# Altium PCB NixieClock_B1.PcbDoc
Units mm, origin at the board's own origin, x right, y up, seen from the top; angles counter-clockwise.
Board outline 180 x 50 mm, 2 copper layers (Top Layer, Bottom Layer); 112 components, 113 nets, 374 pads, 238 vias.
Unrouted connection lines stored in the file: 4.
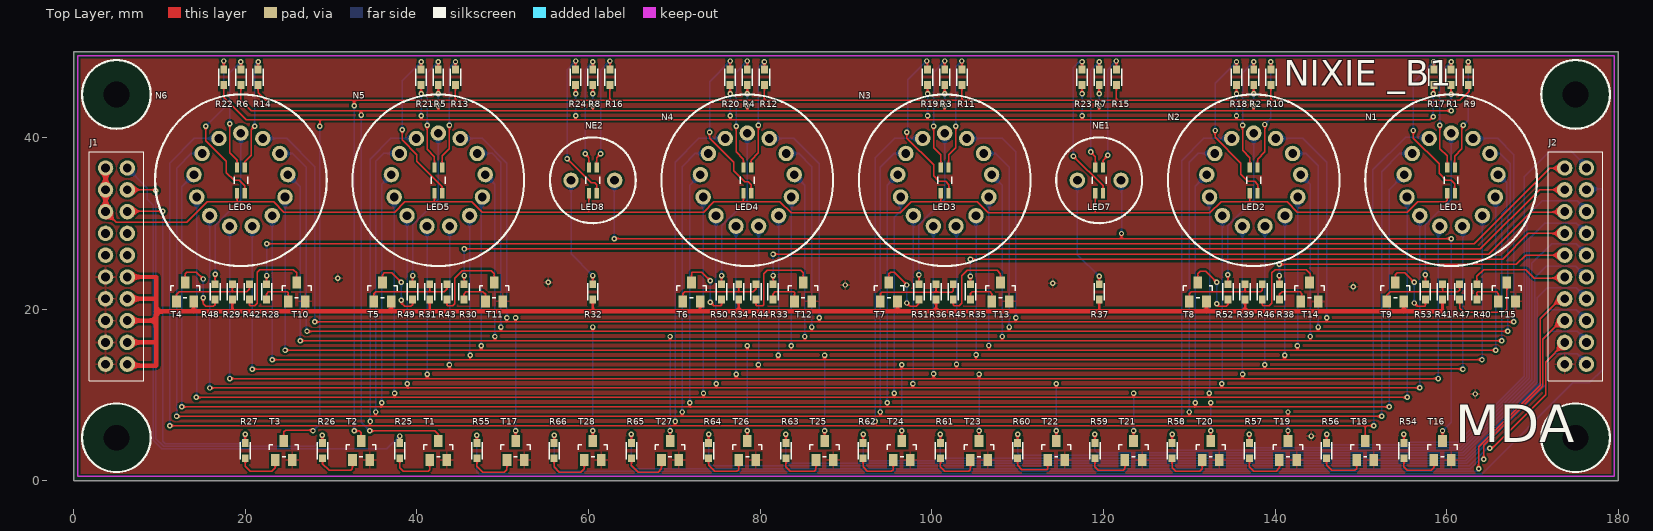
[diagram p0: Top Layer view]
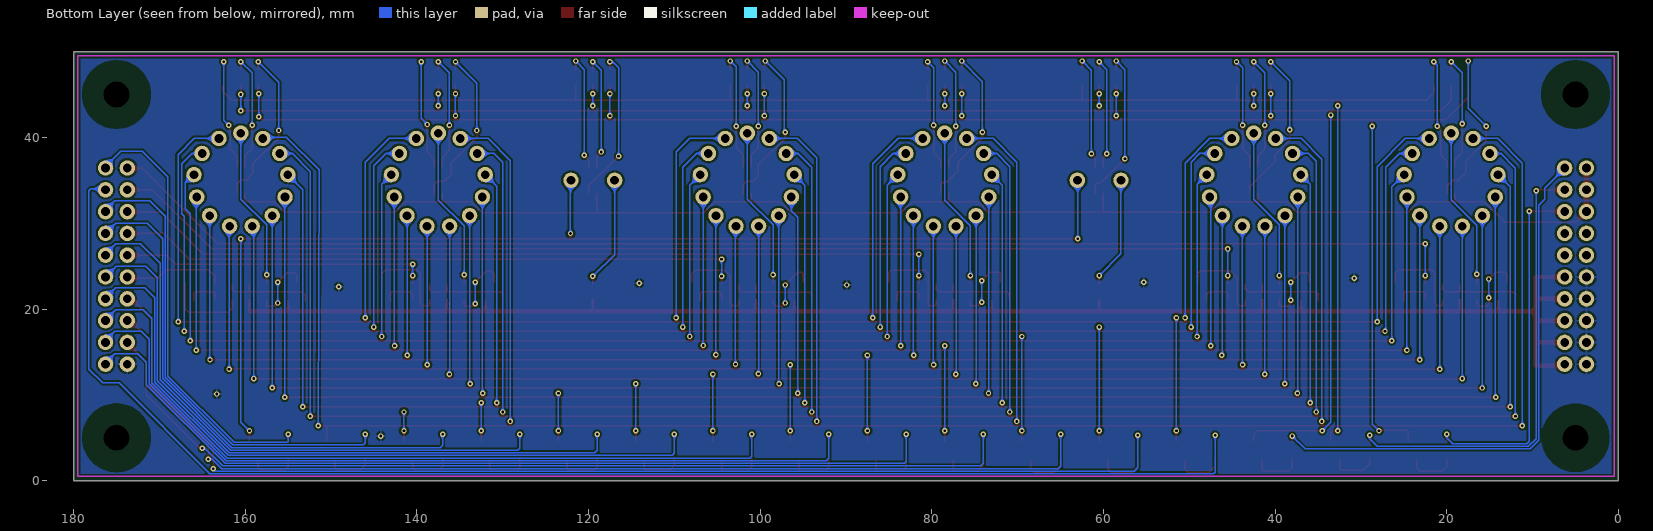
[diagram p1: Bottom Layer view, seen from below]
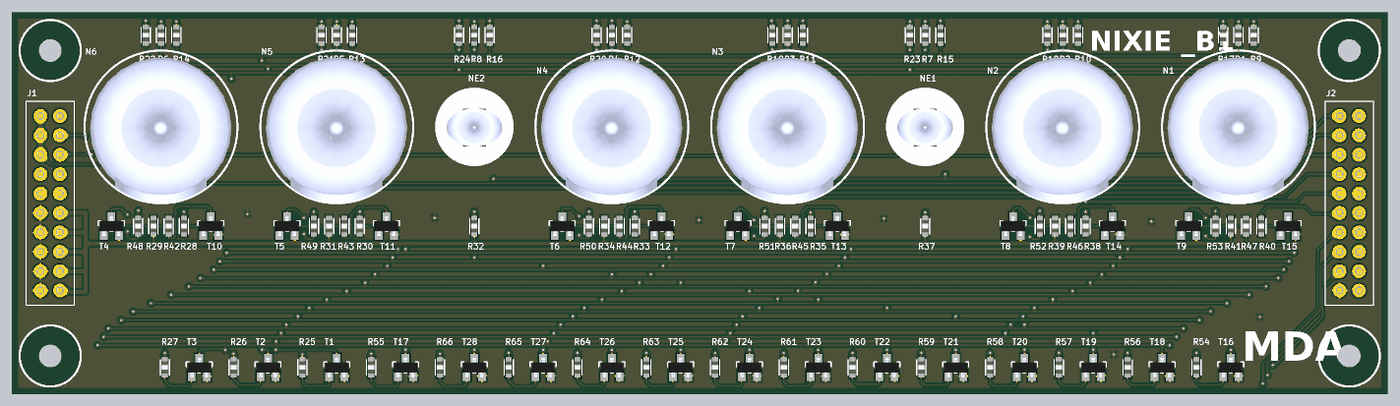
[diagram p2: 3D render of the assembled board from above, using the file's embedded part models]

## Layer stack, top to bottom
Top Solder: solder mask 0.0102, Solder Resist, Dk 3.5
Top Layer: signal copper 0.0356
Dielectric 1: dielectric 0.32, FR-4, Dk 4.8
Bottom Layer: signal copper 0.0356
Bottom Solder: solder mask 0.0102, Solder Resist, Dk 3.5

## Board outline
0,0 180,0 180,50 0,50

## Design rules (kind name [scope] priority, off if disabled: settings)
Clearance BottomPolygon [InNamedPolygon('Bottom Layer-GND')] p1: gap=0.254 ignorepadtopadclearanceinfootprint=FALSE
Clearance TopPolygon [InNamedPolygon('Top Layer-GND')] p2: gap=0.254 ignorepadtopadclearanceinfootprint=FALSE except(0: Arc-Hole Track-Hole SMDPad-Hole THPad-Hole Via-Hole Fill-Hole Poly-Hole Region-Hole Text-Hole)
Clearance [All] p3: gap=0.152 ignorepadtopadclearanceinfootprint=FALSE
ComponentClearance [All] p1: gap=0 collisioncheckmode=3 verticalgap=2540 showdistances=FALSE
Height [All] p1: minheight=0 maxheight=150 prefheight=12.7
HoleSize [All] p1: absolutevalues=TRUE maxlimit=5 minlimit=0.025 maxpercent=80.000 minpercent=20.000
MinimumSolderMaskSliver [All] p1: minsoldermaskwidth=0.152
PolygonConnect [All] p1: connectstyle=Relief reliefconductorwidth=0.254 reliefentries=4 polygonreliefangle="90 Angle" airgapwidth=0.254
RoutingVias [All] p1: holewidth=0.305 width=0.635 viastyle="Through Hole" minholewidth=0.305 minwidth=0.635 maxholewidth=0.305 maxwidth=0.635
SolderMaskExpansion [All] p1: expansion=0.102
Width [All] p1: maxlimit=0.508 minlimit=0.152 preferedwidth=0.254 minimp=50.000000 maximp=50.000000 favimp=50.000000
26 further rules are at their usual default settings.

## Classes and differential pairs
component class nixie_tube: J2 N1 N2 N3 N4 N5 N6 NE1 NE2 R28 R29 R30 R31 R32 R33 R34 R35 R36 R37 R38 R39 R40 R41 R42 R43 R44 R45 R46 R47 R48 R49 R50 R51 R52 R53 R54 R55 R56 R57 R58 R59 R60 R61 R62 R63 R64 R65 R66 T4 T5 T6 T7 T8 T9 T10 T11 T12 T13 T14 T15 T16 T17 T18 T19 T20 T21 T22 T23 T24 T25 T26 T27 T28
component class nixie_light: J1 LED1 LED2 LED3 LED4 LED5 LED6 LED7 LED8 R1 R2 R3 R4 R5 R6 R7 R8 R9 R10 R11 R12 R13 R14 R15 R16 R17 R18 R19 R20 R21 R22 R23 R24 R25 R26 R27 T1 T2 T3

## Components (designator, comment, footprint, x,y, rotation, side; value= is the part's Value field where it differs from the comment)
J1 "PIN_2X10" PIN_2X10_HDR 5,25 r270 top
J2 "PIN_2X10" PIN_2X10_HDR 175,25 r270 top
LED1 "RGB" 1205-RGB 160.5,35 r270 top
LED2 "RGB" 1205-RGB 137.5,35 r270 top
LED3 "RGB" 1205-RGB 101.5,35 r270 top
LED4 "RGB" 1205-RGB 78.5,35 r270 top
LED5 "RGB" 1205-RGB 42.5,35 r270 top
LED6 "RGB" 1205-RGB 19.5,35 r270 top
LED7 "RGB" 1205-RGB 119.5,35 r270 top
LED8 "RGB" 1205-RGB 60.5,35 r270 top
N1 "NIXIE-IN14" NIXIE_IN-14 160.5,35 r0 top
N2 "NIXIE-IN14" NIXIE_IN-14 137.5,35 r0 top
N3 "NIXIE-IN14" NIXIE_IN-14 101.5,35 r0 top locked
N4 "NIXIE-IN14" NIXIE_IN-14 78.5,35 r0 top
N5 "NIXIE-IN14" NIXIE_IN-14 42.5,35 r0 top locked
N6 "NIXIE-IN14" NIXIE_IN-14 19.5,35 r0 top locked
NE1 "NEON-LAMP" NIXIE_IN-3 119.5,35 r0 top
NE2 "NEON-LAMP" NIXIE_IN-3 60.5,35 r0 top
R1 "1K8Ω   1%" 0603 160.5,47 r90 top
R2 "1K8Ω   1%" 0603 137.5,47 r90 top
R3 "1K8Ω   1%" 0603 101.5,47 r90 top
R4 "1K8Ω   1%" 0603 78.5,47 r90 top
R5 "1K8Ω   1%" 0603 42.5,47 r90 top
R6 "1K8Ω   1%" 0603 19.5,47 r90 top
R7 "1K8Ω   1%" 0603 119.5,47 r90 top
R8 "1K8Ω   1%" 0603 60.5,47 r90 top
R9 "8K6Ω   1%" 0603 162.5,47 r90 top
R10 "8K6Ω   1%" 0603 139.5,47 r90 top
R11 "8K6Ω   1%" 0603 103.5,47 r90 top
R12 "8K6Ω   1%" 0603 80.5,47 r90 top
R13 "8K6Ω   1%" 0603 44.5,47 r90 top
R14 "8K6Ω   1%" 0603 21.5,47 r90 top
R15 "8K6Ω   1%" 0603 121.5,47 r90 top
R16 "8K6Ω   1%" 0603 62.5,47 r90 top
R17 "1K2Ω   1%" 0603 158.5,47 r90 top
R18 "1K2Ω   1%" 0603 135.5,47 r90 top
R19 "1K2Ω   1%" 0603 99.5,47 r90 top
R20 "1K2Ω   1%" 0603 76.5,47 r90 top
R21 "1K2Ω   1%" 0603 40.5,47 r90 top
R22 "1K2Ω   1%" 0603 17.5,47 r90 top
R23 "1K2Ω   1%" 0603 117.5,47 r90 top
R24 "1K2Ω   1%" 0603 58.5,47 r90 top
R25 "33KΩ   1%" 0603 38,3.5 r270 top
R26 "33KΩ   1%" 0603 29,3.5 r270 top
R27 "33KΩ   1%" 0603 20,3.5 r270 top
R28 "33KΩ   1%" 0603 22.5,22 r90 top
R29 "100KΩ   1%" 0603 18.5,22 r270 top
R30 "33KΩ   1%" 0603 45.5,22 r90 top
R31 "100KΩ   1%" 0603 41.5,22 r270 top
R32 "100KΩ   1%" 0603 60.5,22 r270 top
R33 "33KΩ   1%" 0603 81.5,22 r270 top
R34 "100KΩ   1%" 0603 77.5,22 r270 top
R35 "33KΩ   1%" 0603 104.5,22 r90 top
R36 "100KΩ   1%" 0603 100.5,22 r270 top
R37 "100KΩ   1%" 0603 119.5,22 r270 top
R38 "33KΩ   1%" 0603 140.5,22 r90 top
R39 "100KΩ   1%" 0603 136.5,22 r270 top
R40 "33KΩ   1%" 0603 163.5,22 r270 top
R41 "100KΩ   1%" 0603 159.5,22 r270 top
R42 "470KΩ   1%" 0603 20.5,22 r90 top
R43 "470KΩ   1%" 0603 43.5,22 r90 top
R44 "470KΩ   1%" 0603 79.5,22 r90 top
R45 "470KΩ   1%" 0603 102.5,22 r90 top
R46 "470KΩ   1%" 0603 138.5,22 r90 top
R47 "470KΩ   1%" 0603 161.5,22 r90 top
R48 "10KΩ   1%" 0603 16.5,22 r270 top
R49 "10KΩ   1%" 0603 39.5,22 r270 top
R50 "10KΩ   1%" 0603 75.5,22 r270 top
R51 "10KΩ   1%" 0603 98.5,22 r270 top
R52 "10KΩ   1%" 0603 134.5,22 r270 top
R53 "10KΩ   1%" 0603 157.5,22 r270 top
R54 "33KΩ   1%" 0603 155,3.5 r270 top
R55 "33KΩ   1%" 0603 47,3.5 r270 top
R56 "33KΩ   1%" 0603 146,3.5 r270 top
R57 "33KΩ   1%" 0603 137,3.5 r270 top
R58 "33KΩ   1%" 0603 128,3.5 r270 top
R59 "33KΩ   1%" 0603 119,3.5 r270 top
R60 "33KΩ   1%" 0603 110,3.5 r270 top
R61 "33KΩ   1%" 0603 101,3.5 r270 top
R62 "33KΩ   1%" 0603 92,3.5 r270 top
R63 "33KΩ   1%" 0603 83,3.5 r270 top
R64 "33KΩ   1%" 0603 74,3.5 r270 top
R65 "33KΩ   1%" 0603 65,3.5 r270 top
R66 "33KΩ   1%" 0603 56,3.5 r270 top
T1 "MMBTA42" SOT-23 42.5,3.5 r0 top
T2 "MMBTA42" SOT-23 33.5,3.5 r0 top
T3 "MMBTA42" SOT-23 24.5,3.5 r0 top
T4 "MMBTA92" SOT-23 13,22 r0 top
T5 "MMBTA92" SOT-23 36,22 r0 top
T6 "MMBTA92" SOT-23 72,22 r0 top
T7 "MMBTA92" SOT-23 95,22 r0 top
T8 "MMBTA92" SOT-23 131,22 r0 top
T9 "MMBTA92" SOT-23 154,22 r0 top
T10 "MMBTA42" SOT-23 26,22 r0 top
T11 "MMBTA42" SOT-23 49,22 r0 top
T12 "MMBTA42" SOT-23 85,22 r0 top
T13 "MMBTA42" SOT-23 108,22 r0 top
T14 "MMBTA42" SOT-23 144,22 r0 top
T15 "MMBTA42" SOT-23 167,22 r0 top
T16 "MMBTA42" SOT-23 159.5,3.5 r0 top
T17 "MMBTA42" SOT-23 51.5,3.5 r0 top
T18 "MMBTA42" SOT-23 150.5,3.5 r0 top
T19 "MMBTA42" SOT-23 141.5,3.5 r0 top
T20 "MMBTA42" SOT-23 132.5,3.5 r0 top
T21 "MMBTA42" SOT-23 123.5,3.5 r0 top
T22 "MMBTA42" SOT-23 114.5,3.5 r0 top
T23 "MMBTA42" SOT-23 105.5,3.5 r0 top
T24 "MMBTA42" SOT-23 96.5,3.5 r0 top
T25 "MMBTA42" SOT-23 87.5,3.5 r0 top
T26 "MMBTA42" SOT-23 78.5,3.5 r0 top
T27 "MMBTA42" SOT-23 69.5,3.5 r0 top
T28 "MMBTA42" SOT-23 60.5,3.5 r0 top

## Footprints (in the part's own frame and the unit in brackets; to place one, negate y for a bottom-side part, rotate by r counter-clockwise, add the part's x,y. Pads: shape width x height; smd on the part's side, far side on the other; paste and mask are expansions set on the pad)
0603 [mm]
  rect 0.9x0.8 smd: 1(-0.9,0) 2(0.9,0)
  silkscreen extent -1,-0.6 1,0.6, body extent -0.8,-0.43 0.8,0.43, height 0.83
1205-RGB [mm]
  rect 1.2x0.5 smd: 1(-1.5,-0.45) 2(1.5,-0.45) 3(1.5,0.45) 4(-1.5,0.45)
  silkscreen extent -0.4,-0.8 0.4,0.8, body extent -1.59,-0.81 1.61,0.79, height 1.1
NIXIE_IN-3 [mm]
  round 1.8 hole 1.02: 1(-2.54,0) 2(2.54,0)
  silkscreen extent -5,-5 5,5, body extent -5,-5.08 5,4.92, height 37.33
NIXIE_IN-14 [mm]
  round 1.8 hole 1: 1(0,5.5) 2(2.556,4.87) 3(4.527,3.124) 4(5.46,0.663) 5(5.142,-1.951) 6(3.647,-4.117) 7(1.316,-5.34) 8(-1.316,-5.34) 9(-3.647,-4.117) 10(-5.143,-1.95) 11(-5.46,0.663) 12(-4.526,3.124) 13(-2.556,4.87)
  silkscreen extent -10,-10 10,10, body extent -9.29,-9.91 9.21,9.09, height 70.15
PIN_2X10_HDR [mm]
  round 1.8 hole 1.02: 1(-11.43,-1.27) 2(-8.89,-1.27) 3(-6.35,-1.27) 4(-3.81,-1.27) 5(-1.27,-1.27) 6(1.27,-1.27) 7(3.81,-1.27) 8(6.35,-1.27) 9(8.89,-1.27) 10(11.43,-1.27) 11(-11.43,1.27) 12(-8.89,1.27) 13(-6.35,1.27) 14(-3.81,1.27) 15(-1.27,1.27) 16(1.27,1.27) 17(3.81,1.27) 18(6.35,1.27) 19(8.89,1.27) 20(11.43,1.27)
  silkscreen extent -13.34,-3.18 13.33,3.18, body extent -12.7,-2.54 12.7,2.54, height 2.29
SOT-23 [mm]
  rect 1x1.4 smd: 1(-1,-1.1) 2(1,-1.1) 3(0,1.1)
  silkscreen extent -1.7,-0.7 1.7,0.7, body extent -1.5,-1.25 1.5,1.25, height 1.15

## Part data
R1 R2 R3 R4 R5 R6 R7 R8 R9 R10 R11 R12 R13 R14 R15 R16 R17 R18 R19 R20 R21 R22 R23 R24 R25 R26 R27 R28 R29 R30 R31 R32 R33 R34 R35 R36 R37 R38 R39 R40 R41 R42 R43 R44 R45 R46 R47 R48 R49 R50 R51 R52 R53 R54 R55 R56 R57 R58 R59 R60 R61 R62 R63 R64 R65 R66: library part RES
T1 T2 T3 T10 T11 T12 T13 T14 T15 T16 T17 T18 T19 T20 T21 T22 T23 T24 T25 T26 T27 T28: library part NPN
T4 T5 T6 T7 T8 T9: library part PNP
J1 J2: System=Connector

## Free pads (board coordinates)
  round 0 hole 3 unplated: 0(5,5) 0(5,45) 0(175,5) 0(175,45)

## Via types
v1: diameter 0.635, hole 0.305, Top Layer to Bottom Layer, tented both sides, 238 vias

## Nets (pads, with @x,y where several pads share a name; then routed paths per layer and width w, separated by ;. In a path a pad name is that pad's centre, name@x,y a point inside that pad or via, vN(x,y) a via of type N, cw(c..) or ccw(c..) an arc to the next point about the centre after c; other vN are vias at no path point)
12V: J1.1 J1.2 J1.3 LED1.2 LED2.2 LED3.2 LED4.2 LED5.2 LED6.2 LED7.2 LED8.2 | length 178.6
  Top Layer w0.152: J1.3 4.98,30.1 13.2,30.1 15.6,32.5 19.1,32.5 ; LED6.2 19.05,32.55 19.1,32.5 ; LED5.2 42.05,32.55 42,32.5 ; LED8.2 60.05,31.35 60,31.3 ; LED4.2 78.05,32.55 78,32.5 ; LED3.2 101.05,32.55 101,32.5 ; LED7.2 119.05,31.25 119,31.2 ; LED2.2 137.05,32.55 137.1,32.5 ; LED1.2 160.05,32.65 159.9,32.5 156.6,32.5 155.4,31.3 142.6,31.3 141.4,32.5 137.1,32.5 ; 19.1,32.5 23.3,32.5 24.5,31.3 37.4,31.3 38.6,32.5 42,32.5 ; 42,32.5 46.4,32.5 47.6,31.3 60,31.3 ; 60,31.3 73.4,31.3 74.6,32.5 78,32.5 ; 78,32.5 82.3,32.5 83.6,31.2 96.3,31.2 97.6,32.5 101,32.5 ; 101,32.5 105.3,32.5 106.6,31.2 119,31.2 ; 119,31.2 132.4,31.2 133.7,32.5 137.1,32.5
  Top Layer w0.508: J1.3 J1.2 J1.1
180V: J1.16 J1.17 J1.18 J1.19 J1.20 R29.2 R31.2 R32.2 R34.2 R36.2 R37.2 R39.2 R41.2 T4.2 T5.2 T6.2 T7.2 T8.2 T9.2 | length 196.6
  Top Layer w0.254: 14,19.724 T4.2 ; 18.5,19.724 R29.2 ; 37,19.724 T5.2 ; R31.2 41.5,19.824 41.6,19.724 ; 60.5,19.724 R32.2 ; T6.2 73,19.824 73.1,19.724 ; 77.5,19.724 R34.2 ; 96,19.724 T7.2 ; 100.5,19.724 R36.2 ; R37.2 119.5,19.791 120.943,19.791 ; 132,19.724 T8.2 ; 136.5,19.724 R39.2 ; 155,19.724 T9.2 ; 159.5,19.724 R41.2
  Top Layer w0.508: J1.20 6.44,13.4 9.6,13.4 9.624,13.424 9.624,16.1 ; J1.19 9.614,16.11 9.624,16.1 ; J1.18 9.624,18.65 ; J1.17 9.614,21.19 9.624,21.2 ; J1.16 9.624,23.73 9.624,21.2 ; 159.5,19.724 155,19.724 136.5,19.724 132,19.724 100.5,19.724 96,19.724 77.5,19.724 73.1,19.724 60.5,19.724 41.6,19.724 37,19.724 18.5,19.724 14,19.724 9.624,19.724 ; 9.624,16.1 9.624,18.65 ; 9.624,18.65 9.624,19.724 ; 9.624,19.724 9.624,21.2
A0: N1.1 R53.1 | length 18.8
  Top Layer w0.152: R53.1 v1(157.5,24)
  Bottom Layer w0.152: v1(157.5,24) 157.5,29.8 160.5,32.8 N1.1
A1: N2.1 R52.1 | length 18.8
  Top Layer w0.152: R52.1 v1(134.5,24)
  Bottom Layer w0.152: v1(134.5,24) 134.5,29.7 137.5,32.7 N2.1
A2: N3.1 R51.1 | length 18.8
  Top Layer w0.152: R51.1 v1(98.5,24)
  Bottom Layer w0.152: v1(98.5,24) 98.5,29.8 101.5,32.8 N3.1
A3: N4.1 R50.1 | length 18.8
  Top Layer w0.152: R50.1 v1(75.5,23.9)
  Bottom Layer w0.152: v1(75.5,23.9) 75.5,29.7 78.5,32.7 N4.1
A4: N5.1 R49.1 | length 18.8
  Top Layer w0.152: R49.1 v1(39.5,23.9)
  Bottom Layer w0.152: v1(39.5,23.9) 39.5,29.8 42.5,32.8 N5.1
A5: N6.1 R48.1 | length 18.9
  Top Layer w0.152: R48.1 16.5,23.925 16.55,23.975 16.55,24.025 v1(16.525,24.05)
  Bottom Layer w0.152: v1(16.525,24.05) 16.525,29.775 19.5,32.75 N6.1
BLUE: J1.13 R27.1 | length 42.4
  Top Layer w0.152: J1.13 6.32,31.4 v1(10.4,31.4) ; R27.1 v1(20,5.4)
  Bottom Layer w0.152: v1(10.4,31.4) 10.4,4.6 10.69,4.31 19.31,4.31 20,5 v1(20,5.4)
D0: N1.12 N2.12 N3.12 N4.12 N5.12 N6.12 T19.3 | length 341.1
  Top Layer w0.152: v1(12,7.5) 34.1,7.5 35.2,7.5 ; v1(35.2,8) 35.2,7.5 ; v1(70.9,8) 70.9,7.5 ; v1(94,8) 94,7.5 ; v1(130,8) 130,7.5 ; T19.3 v1(141.5,5.8) ; v1(141.5,8) 141.5,7.5 ; v1(152.4,7.5) 141.5,7.5 ; 35.2,7.5 70.9,7.5 ; 70.9,7.5 94,7.5 ; 94,7.5 130,7.5 ; 130,7.5 141.5,7.5
  Bottom Layer w0.152: v1(12,7.5) 12,36.4 13.724,38.124 N6.12 ; v1(35.2,8) 35.2,37.2 36.124,38.124 N5.12 ; v1(70.9,8) 70.9,36.6 72.424,38.124 N4.12 ; v1(94,8) 94,36.5 95.624,38.124 N3.12 ; v1(130,8) 130,37.1 131.024,38.124 N2.12 ; v1(141.5,5.8) v1(141.5,8) ; v1(152.4,7.5) 152.4,36 154.524,38.124 N1.12
D1: N1.3 N2.3 N3.3 N4.3 N5.3 N6.3 T28.3 | length 290.5
  Top Layer w0.152: v1(27.2,17.4) 49.8,17.4 ; v1@49.9,17.9 v1(49.8,17.9) 49.8,17.4 ; T28.3 v1(60.5,5.8) ; v1(60.5,17.9) 60.5,17.4 ; v1(86,17.9) 86,17.4 ; v1(109,17.9) 109,17.4 ; v1(145,17.9) 145,17.4 ; v1(167.1,17.4) 145,17.4 ; 49.8,17.4 60.5,17.4 ; 60.5,17.4 86,17.4 ; 86,17.4 109,17.4 ; 109,17.4 145,17.4
  Bottom Layer w0.152: N6.3 25.476,38.124 27.1,36.5 27.1,17.5 v1(27.2,17.4) ; N5.3 48.776,38.124 49.8,37.1 v1(49.8,17.9) ; v1(60.5,5.8) v1(60.5,17.9) ; N4.3 84.476,38.124 86,36.6 v1(86,17.9) ; N3.3 107.376,38.124 109,36.5 v1(109,17.9) ; N2.3 143.576,38.124 145,36.7 v1(145,17.9) ; N1.3 166.176,38.124 167.4,36.9 167.4,31.1 167.1,30.8 v1(167.1,17.4)
D2: N1.4 N2.4 N3.4 N4.4 N5.4 N6.4 T27.3 | length 272.7
  Top Layer w0.152: v1(26.4,16.3) 49.1,16.3 ; v1(49.1,16.8) 49.1,16.3 ; T27.3 v1(69.5,5.8) ; v1(69.5,16.8) 69.5,16.3 ; v1(85.2,16.8) 85.2,16.3 ; v1(108.2,16.8) 108.2,16.3 ; v1(144.1,16.8) 144.1,16.3 ; v1(166.4,16.3) 144.1,16.3 ; 49.1,16.3 69.5,16.3 ; 69.5,16.3 85.2,16.3 ; 85.2,16.3 108.2,16.3 ; 108.2,16.3 144.1,16.3
  Bottom Layer w0.152: N6.4 26.4,34.223 v1(26.4,16.3) ; N5.4 49.1,34.523 v1(49.1,16.8) ; v1(69.5,5.8) v1(69.5,16.8) ; N4.4 85.2,34.423 v1(85.2,16.8) ; N3.4 108.2,34.423 v1(108.2,16.8) ; N2.4 144.1,34.523 v1(144.1,16.8) ; N1.4 166.023,35.6 N1.4@166.1,35.6 ; v1(166.4,16.3) 166.4,31.1 167,31.7 167,34.7 N1.4@166.1,35.6 ; N1.4@166.6,35.6 N1.4@166.1,35.6
D3: N1.5 N2.5 N3.5 N4.5 N5.5 N6.5 T26.3 | length 259.8
  Top Layer w0.152: v1@24.7,15.2 47.5,15.2 ; v1(47.5,15.7) 47.5,15.2 ; T26.3 v1(78.5,5.8) ; v1(78.5,15.7) 78.5,15.2 ; 83.6,15.3 v1(83.6,15.7) ; v1(106.65,15.75) 106.65,15.225 106.675,15.2 ; v1(142.6,15.7) 142.6,15.2 ; v1(165.7,15.2) 142.6,15.2 ; 47.5,15.2 78.5,15.2 ; 78.5,15.2 106.675,15.2 ; 106.675,15.2 142.6,15.2
  Bottom Layer w0.152: N6.5 24.642,15.258 v1@24.7,15.2 ; v1(47.5,15.7) 47.5,32.907 N5.5 ; v1(78.5,5.8) v1(78.5,15.7) ; v1(83.6,15.7) 83.642,15.742 N4.5 ; N3.5 106.642,15.758 v1(106.65,15.75) ; v1(142.6,15.7) 142.642,15.742 N2.5 ; N1.5 165.7,32.992 v1(165.7,15.2)
  other v1: 24.642,15.2
D4: N1.6 N2.6 N3.6 N4.6 N5.6 N6.6 T25.3 | length 252.2
  Top Layer w0.152: v1@23.2,14.1 46.1,14.1 ; v1(46.2,14.6) 46.2,14.2 46.1,14.1 ; v1(82.1,14.6) 82.1,14.1 ; T25.3 v1@87.5,5.7 ; v1(87.5,14.6) 87.5,14.1 ; v1(105.15,14.65) 105.15,14.125 105.125,14.1 ; v1(141.1,14.6) 141.1,14.1 ; v1(164.1,14.1) 141.1,14.1 ; 46.1,14.1 82.1,14.1 ; 82.1,14.1 87.5,14.1 ; 87.5,14.1 105.125,14.1 ; 105.125,14.1 141.1,14.1
  Bottom Layer w0.152: N6.6 23.147,14.153 v1@23.2,14.1 ; N5.6 46.147,14.653 v1(46.2,14.6) ; v1(82.1,14.6) 82.147,14.647 N4.6 ; v1(87.5,5.8) v1(87.5,14.6) ; N3.6 105.147,14.653 v1(105.15,14.65) ; v1(141.1,14.6) 141.147,14.647 N2.6 ; v1(164.1,14.1) 164.147,14.147 N1.6
  other v1: 23.147,14.1
D5: N1.7 N2.7 N3.7 N4.7 N5.7 N6.7 T24.3 | length 250.5
  Top Layer w0.152: v1(20.816,13) 43.8,13 ; v1(43.8,13.5) 43.8,13 ; v1(79.8,13.5) 79.8,13 ; T24.3 v1(96.5,5.8) ; v1(96.5,13.5) 96.5,13 ; v1(102.875,13.55) 102.875,13.021 ; v1(138.8,13.5) 138.8,13.021 ; v1@161.88,13.12 v1(161.88,13) 161.859,13.021 138.8,13.021 ; 43.8,13 79.8,13 ; 79.8,13 96.5,13 ; 96.5,13 96.521,13.021 102.875,13.021 ; 102.875,13.021 138.8,13.021
  Bottom Layer w0.152: v1@20.816,13.116 N6.7 ; v1@43.816,13.516 N5.7 ; v1(79.8,13.5) 79.816,13.516 N4.7 ; v1(96.5,5.8) v1(96.5,13.5) ; N3.7 102.875,29.601 v1(102.875,13.55) ; v1(138.8,13.5) 138.8,29.644 N2.7 ; N1.7 161.84,29.66 161.88,29.62 v1(161.88,13)
  Bottom Layer w0.254: v1(43.8,13.5) v1@43.816,13.516
D6: N1.8 N2.8 N3.8 N4.8 N5.8 N6.8 T23.3 | length 255.9
  Top Layer w0.152: v1@18.2,11.9 41.2,11.9 ; v1(41.2,12.4) 41.2,11.9 ; v1(77.2,12.4) 77.2,11.9 ; v1(100.2,12.475) 100.2,11.9 ; T23.3 v1(105.5,5.8) ; v1(105.5,12.4) 105.5,11.9 ; v1(136.2,12.4) 136.2,11.9 ; v1(159,11.9) 136.2,11.9 ; 41.2,11.9 77.2,11.9 ; 77.2,11.9 100.2,11.9 ; 100.2,11.9 105.5,11.9 ; 105.5,11.9 136.2,11.9
  Bottom Layer w0.152: N6.8 18.184,11.916 v1@18.2,11.9 ; N5.8 41.184,12.416 v1(41.2,12.4) ; N4.8 77.184,12.416 v1(77.2,12.4) ; N3.8 100.184,12.491 v1(100.2,12.475) ; v1(105.5,5.8) v1(105.5,12.4) ; N2.8 136.184,12.416 v1(136.2,12.4) ; v1(159,11.9) 159,29.276 158.9,29.376 N1.8
  other v1: 18.184,11.9
D7: N1.9 N2.9 N3.9 N4.9 N5.9 N6.9 T22.3 | length 268.7
  Top Layer w0.152: v1(15.853,10.8) 38.9,10.8 ; v1(38.9,11.3) 38.9,10.8 ; v1(74.9,11.3) 74.9,10.8 ; v1(97.8,11.3) 97.8,10.8 ; T22.3 v1(114.5,5.8) ; v1(114.5,11.3) 114.5,10.8 ; v1(133.8,11.3) 133.8,10.8 ; v1(156.853,10.847) 156.805,10.8 133.8,10.8 ; 38.9,10.8 74.9,10.8 ; 74.9,10.8 97.8,10.8 ; 97.8,10.8 114.5,10.8 ; 114.5,10.8 133.8,10.8
  Bottom Layer w0.152: v1@15.853,10.847 N6.9 ; N5.9 38.853,11.347 v1(38.9,11.3) ; N4.9 74.853,11.347 v1(74.9,11.3) ; v1(97.8,11.3) 97.853,11.353 N3.9 ; v1(114.5,5.8) v1(114.5,11.3) ; v1(133.8,11.3) 133.853,11.353 N2.9 ; v1(156.853,10.847) N1.9
D8: N1.10 N2.10 N3.10 N4.10 N5.10 N6.10 T21.3 | length 287.5
  Top Layer w0.152: v1(14.3,9.7) 37.4,9.7 ; v1(37.4,10.2) 37.4,9.7 ; v1(73.4,10.2) 73.4,9.7 ; v1(95.6,10.2) 95.6,9.7 ; T21.3 v1(123.5,5.8) ; v1(123.5,10.2) 123.5,9.7 ; v1(132.3,10.2) 132.3,9.7 ; v1(155.4,9.7) 132.3,9.7 ; 37.4,9.7 73.4,9.7 ; 73.4,9.7 95.6,9.7 ; 95.6,9.7 123.5,9.7 ; 123.5,9.7 132.3,9.7
  Bottom Layer w0.152: v1@14.3,9.9 14.357,9.957 N6.10 ; N5.10 37.357,10.243 v1(37.4,10.2) ; N4.10 73.357,10.243 v1(73.4,10.2) ; v1(95.6,10.2) 95.6,30.7 96.357,31.457 N3.10 ; v1(123.5,5.8) v1(123.5,10.2) ; v1(132.3,10.2) 132.357,10.257 N2.10 ; N1.10 155.4,33.007 v1(155.4,9.7)
D9: N1.11 N2.11 N3.11 N4.11 N5.11 N6.11 T20.3 | length 311.4
  Top Layer w0.152: v1(12.6,8.6) 35.9,8.6 ; v1(35.9,9.1) 35.9,8.6 ; v1(71.8,9.1) 71.8,8.6 ; 94.8,8.7 v1(94.8,9.1) ; v1(130.7,9.1) 130.7,8.6 ; T20.3 v1(132.5,5.8) ; v1(132.5,9.1) 132.5,8.6 ; v1(153.3,8.6) 151.9,8.6 132.5,8.6 ; 35.9,8.6 71.8,8.6 ; 71.8,8.6 94.8,8.6 130.7,8.6 ; 130.7,8.6 132.5,8.6
  Bottom Layer w0.152: v1(12.6,8.6) 12.6,34.223 N6.11 ; v1@35.8,9.1 35.9,9.2 35.9,34.523 N5.11 ; v1(71.8,9.1) 71.8,34.423 N4.11 ; v1(94.8,9.1) 94.8,34.423 N3.11 ; v1(130.7,9.1) 130.7,34.323 N2.11 ; v1(132.5,5.8) v1(132.5,9.1) ; v1(153.3,8.6) 153.3,33.923 N1.11
GND: J1.6 J1.7 J1.8 J1.9 J1.10 J2.10 T1.2 T2.2 T3.2 T10.2 T11.2 T12.2 T13.2 T14.2 T15.2 T16.2 T17.2 T18.2 T19.2 T20.2 T21.2 T22.2 T23.2 T24.2 T25.2 T26.2 T27.2 T28.2
  other v1: 144.2,5.2 163.3,10.1 149.1,22.6 89.9,22.8 114.1,23 55.3,23.1 30.8,23.6
GREEN: J1.12 R26.1 | length 53.7
  Top Layer w0.152: J1.12 9.51,33.89 v1(9.6,33.8) ; R26.1 v1(29,5.3)
  Bottom Layer w0.152: v1(9.6,33.8) 9.6,4.9 10.495,4.005 28.105,4.005 29,4.9 v1(29,5.3)
LB: R17.1 R18.1 R19.1 R20.1 R21.1 R22.1 R23.1 R24.1 T3.3 | length 213
  Top Layer w0.152: R22.1 17.5,44.7 20.146,42.054 28.7,42.054 ; T3.3 24.5,5.7 24.7,5.9 27.8,5.9 27.9,6 v1(27.9,5.8) ; v1(28.7,41.3) 28.7,42.054 ; v1(40.5,42.5) 40.5,42.054 ; v1(40.5,45.1) R21.1 ; v1(58.5,42.5) 58.5,42.054 ; v1(58.5,45.1) R24.1 ; v1(76.5,42.5) 76.5,42.054 ; v1(76.5,45.1) R20.1 ; v1(99.5,42.5) 99.5,42.054 ; v1(99.5,45.1) R19.1 ; v1(117.5,42.5) 117.5,42.054 ; v1(117.5,45.1) R23.1 ; v1(135.5,42.5) 135.5,42.054 ; v1(135.5,45.1) R18.1 ; v1(158.4,42.4) 158.054,42.054 135.5,42.054 ; v1(158.4,45.1) 158.5,45.2 R17.1 ; 28.7,42.054 40.5,42.054 ; 40.5,42.054 58.5,42.054 ; 58.5,42.054 76.5,42.054 ; 76.5,42.054 99.5,42.054 ; 99.5,42.054 117.5,42.054 ; 117.5,42.054 135.5,42.054
  Bottom Layer w0.152: v1(27.9,5.8) 28.7,6.6 28.7,7.9 28.7,39.4 v1(28.7,41.3) ; v1(40.5,42.5) v1(40.5,45.1) ; v1(58.5,42.5) v1(58.5,45.1) ; v1(76.5,42.5) v1(76.5,45.1) ; v1(99.5,42.5) v1(99.5,45.1) ; v1(117.5,42.5) v1(117.5,45.1) ; v1(135.5,42.5) v1(135.5,45.1) ; v1(158.4,42.4) v1(158.4,45.1)
LB1: LED1.3 R17.2 | length 19.6
  Top Layer w0.152: v1(156.1,40.8) 156.1,39.9 159.1,36.9 159.1,35.8 159.9,35 160.5,35 160.9,34.6 160.9,33.55 LED1.3 ; R17.2 v1(158.5,48.8)
  Bottom Layer w0.152: v1(156.1,40.8) 156.1,46.4 v1(158.5,48.8)
LB2: LED2.3 R18.2 | length 20
  Top Layer w0.152: v1(133,40.8) 133,40 136,37 136,35.7 136.8,34.9 137.6,34.9 138,34.5 LED2.3@138,33.3 ; R18.2 v1(135.5,48.8)
  Bottom Layer w0.152: v1(133,40.8) 133,46.3 v1(135.5,48.8)
LB3: LED3.3 R19.2 | length 20
  Top Layer w0.152: v1(97.1,40.6) 97.1,39.9 100.2,36.8 100.2,35.5 100.8,34.9 101.6,34.9 102,34.5 LED3.3@102,33.4 ; v1(99.4,48.9) 99.5,48.8 R19.2
  Bottom Layer w0.152: v1(97.1,40.6) 97.2,40.7 97.2,46.7 v1(99.4,48.9)
LB4: LED4.3 R20.2 | length 19.6
  Top Layer w0.152: v1(74.1,40.6) 74.1,39.9 76.9,37.1 76.9,36.1 78.2,34.8 78.6,34.8 78.95,34.45 LED4.3 ; R20.2 v1(76.5,48.9)
  Bottom Layer w0.152: v1(74.1,40.6) 74.1,46.5 v1(76.5,48.9)
LB5: LED5.3 R21.2 | length 19
  Top Layer w0.152: v1(38.3,40.9) 38.3,39.7 40,38 40,37.2 42.95,34.25 LED5.3 ; R21.2 v1(40.5,48.8)
  Bottom Layer w0.152: v1(38.3,40.9) 38.3,46.6 v1(40.5,48.8)
LB6: LED6.3 R22.2 | length 19.5
  Top Layer w0.152: v1(15.4,41.3) 15.4,39.6 17.8,37.2 17.8,35.9 18.7,35 19.3,35 19.95,34.35 LED6.3 ; R22.2 v1(17.5,48.9)
  Bottom Layer w0.152: v1(15.4,41.3) 17.5,43.4 v1(17.5,48.9)
LB7: LED7.3 R23.2 | length 18.2
  Top Layer w0.152: v1(116.5,37.8) 119.95,34.35 LED7.3 ; R23.2 v1(117.5,48.8)
  Bottom Layer w0.152: v1(116.5,37.8) 116.5,48.1 117.2,48.8 v1(117.5,48.8)
LB8: LED8.3 R24.2 | length 18.5
  Top Layer w0.152: v1(57.5,37.5) 60.3,34.7 60.7,34.7 60.95,34.45 LED8.3 ; R24.2 v1(58.5,48.9)
  Bottom Layer w0.152: v1(57.5,37.5) 57.5,47.9 v1(58.5,48.9)
LG: R9.1 R10.1 R11.1 R12.1 R13.1 R14.1 R15.1 R16.1 T2.3 | length 195
  Top Layer w0.152: R14.1 21.5,45.2 22.4,44.3 32.7,44.3 ; v1(32.7,5.8) 33.3,5.8 33.5,5.6 T2.3 ; v1@32.9,43.7 v1(32.7,43.7) 32.7,44.3 ; R13.1 44.5,44.3 ; R16.1 62.5,44.3 ; R12.1 80.5,44.3 ; R11.1 103.5,44.3 ; R15.1 121.5,44.3 ; R10.1 139.5,44.3 ; R9.1 162.6,46 162.6,45.4 161.5,44.3 139.5,44.3 ; 32.7,44.3 44.5,44.3 ; 44.5,44.3 62.5,44.3 ; 62.5,44.3 80.5,44.3 ; 80.5,44.3 103.5,44.3 ; 103.5,44.3 121.5,44.3 ; 121.5,44.3 139.5,44.3
  Bottom Layer w0.152: v1(32.7,5.8) 32.7,6.8 32.7,42.9 v1(32.7,43.7)
LG1: LED1.4 R9.2 | length 13.9
  Top Layer w0.152: LED1.4 160.9,36.55 160.9,37.8 161.75,38.65 161.75,41.25 v1(161.9,41.4) ; R9.2 v1(162.5,48.8)
  Bottom Layer w0.152: v1(161.9,41.4) 162.5,42 v1(162.5,48.8)
LG2: LED2.4 R10.2 | length 13.8
  Top Layer w0.152: LED2.4 137.95,37.45 138.8,38.3 v1(138.8,41.5) ; R10.2 v1(139.5,48.8)
  Bottom Layer w0.152: v1(138.8,41.5) 139.5,42.2 v1(139.5,48.8)
LG3: LED3.4 R11.2 | length 14
  Top Layer w0.152: LED3.4 101.95,37.95 102.8,38.8 v1(102.8,41.3) ; R11.2 v1(103.5,48.9)
  Bottom Layer w0.152: v1(102.8,41.3) 102.8,48.2 v1(103.5,48.9)
LG4: LED4.4 R12.2 | length 13.8
  Top Layer w0.152: LED4.4 78.95,37.35 79.8,38.2 v1(79.8,41.4) ; R12.2 v1(80.5,48.8)
  Bottom Layer w0.152: v1(79.8,41.4) 79.8,48.1 v1(80.5,48.8)
LG5: LED5.4 R13.2 | length 13.8
  Top Layer w0.152: LED5.4 42.95,37.85 43.8,38.7 v1(43.8,41.4) ; R13.2 v1(44.5,48.8)
  Bottom Layer w0.152: v1(43.8,41.4) 43.8,48.1 v1(44.5,48.8)
LG6: LED6.4 R14.2 | length 13.8
  Top Layer w0.152: LED6.4 19.95,37.15 20.7,37.9 20.7,40.9 v1(21.1,41.3) ; R14.2 v1(21.5,48.8)
  Bottom Layer w0.152: v1(21.1,41.3) 21.1,48.4 v1(21.5,48.8)
LG7: LED7.4 R15.2 | length 14
  Top Layer w0.152: LED7.4 119.95,37.35 v1(120.5,37.9) ; R15.2 v1(121.5,48.9)
  Bottom Layer w0.152: v1(120.5,37.9) 120.5,47.9 v1(121.5,48.9)
LG8: LED8.4 R16.2 | length 14
  Top Layer w0.152: LED8.4 60.95,37.65 v1(61.4,38.1) ; R16.2 v1(62.5,48.9)
  Bottom Layer w0.152: v1(61.4,38.1) 61.4,47.8 v1(62.5,48.9)
LR: R1.1 R2.1 R3.1 R4.1 R5.1 R6.1 R7.1 R8.1 T1.3 | length 210.9
  Top Layer w0.152: R6.1 19.5,44.3 20.7,43.1 33.5,43.1 ; v1(33.5,42.6) 33.5,43.1 ; v1(34.5,5.8) 42.1,5.8 42.5,5.4 T1.3 ; v1(42.5,43.7) 42.5,43.1 ; v1(42.5,45.1) R5.1 ; 60.5,43.2 v1(60.5,43.7) ; v1(60.5,45.1) R8.1 ; v1(78.5,43.7) 78.5,43.1 ; v1(78.5,45.1) R4.1 ; v1(101.5,43.7) 101.5,43.1 ; v1(101.5,45.1) R3.1 ; v1(119.5,43.7) 119.5,43.1 ; v1(119.5,45.1) R7.1 ; v1(137.5,43.7) 137.5,43.1 ; v1(137.5,45.1) R2.1 ; v1(160.5,43.1) 137.5,43.1 ; v1(160.5,45) R1.1 ; 33.5,43.1 42.5,43.1 ; 42.5,43.1 78.5,43.1 ; 78.5,43.1 101.5,43.1 ; 101.5,43.1 119.5,43.1 ; 119.5,43.1 137.5,43.1
  Bottom Layer w0.152: v1(33.5,42.6) 33.5,6.8 v1(34.5,5.8) ; v1(42.5,43.7) v1(42.5,45.1) ; v1(60.5,43.7) v1(60.5,45.1) ; v1(78.5,43.7) v1(78.5,45.1) ; v1(101.5,43.7) v1(101.5,45.1) ; v1(119.5,43.7) v1(119.5,45.1) ; v1(137.5,43.7) v1(137.5,45.1) ; v1(160.5,43.1) v1(160.5,45)
LR1: LED1.1 R1.2 | length 14.1
  Top Layer w0.152: v1(159.2,41.4) 159.2,38.7 160.05,37.85 LED1.1 ; R1.2 v1(160.5,48.8)
  Bottom Layer w0.152: v1(159.2,41.4) 159.2,47.5 v1(160.5,48.8)
LR2: LED2.1 R2.2 | length 14.1
  Top Layer w0.152: v1(136.2,41.4) 136.2,38.5 137.05,37.65 LED2.1 ; R2.2 v1(137.5,48.8)
  Bottom Layer w0.152: v1(136.2,41.4) 136.2,47.5 v1(137.5,48.8)
LR3: LED3.1 R3.2 | length 14.3
  Top Layer w0.152: v1(100.2,41.3) 100.2,38.8 101.05,37.95 LED3.1 ; R3.2 v1(101.5,48.9)
  Bottom Layer w0.152: v1(100.2,41.3) 100.2,47.6 v1(101.5,48.9)
LR4: LED4.1 R4.2 | length 14.3
  Top Layer w0.152: v1(77.2,41.3) 77.2,38.3 78.05,37.45 LED4.1 ; R4.2 v1(78.5,48.9)
  Bottom Layer w0.152: v1(77.2,41.3) 77.2,47.6 v1(78.5,48.9)
LR5: LED5.1 R5.2 | length 14.1
  Top Layer w0.152: v1(41.2,41.4) 41.2,38.6 42.05,37.75 LED5.1 ; R5.2 v1(42.5,48.8)
  Bottom Layer w0.152: v1(41.2,41.4) 41.2,47.5 v1(42.5,48.8)
LR6: LED6.1 R6.2 | length 14.1
  Top Layer w0.152: v1(18.2,41.6) 18.2,38.2 19.05,37.35 LED6.1 ; R6.2 v1(19.5,48.8)
  Bottom Layer w0.152: v1(18.2,41.6) 18.2,47.5 v1(19.5,48.8)
LR7: LED7.1 R7.2 | length 13.8
  Top Layer w0.152: v1(118.5,38.3) 119.05,37.75 LED7.1 ; R7.2 v1(119.5,48.8)
  Bottom Layer w0.152: v1(118.5,38.3) 118.5,47.8 v1(119.5,48.8)
LR8: LED8.1 R8.2 | length 13.8
  Top Layer w0.152: v1(59.6,38.1) 60.05,37.65 LED8.1 ; R8.2 v1(60.5,48.8)
  Bottom Layer w0.152: v1(59.6,38.1) 59.6,47.9 v1(60.5,48.8)
NCRL_1: J2.6 R40.1 | length 11.9
  Top Layer w0.152: R40.1 163.5,23.8 164.3,24.6 169.2,24.6 170.2,23.6 173.6,23.6 J2.6
NCRL_2: J2.5 R38.2 | length 36
  Top Layer w0.152: R38.2 v1(140.5,23.9) ; v1(140.5,25.2) 168.1,25.2 169.17,26.27 J2.5
  Bottom Layer w0.152: v1(140.5,23.9) v1(140.5,25.2)
NCRL_3: J2.4 R35.2 | length 73.3
  Top Layer w0.152: R35.2 v1(104.5,23.8) ; v1(104.5,25.8) 166.5,25.8 169.5,28.8 J2.4@173.7,28.8
  Bottom Layer w0.152: v1(104.5,23.8) v1(104.5,25.8)
NCRL_4: J2.3 R33.1 | length 97.7
  Top Layer w0.152: R33.1 v1(81.5,23.9) ; v1(81.5,26.4) 164.9,26.4 169.8,31.3 J2.3@173.7,31.3
  Bottom Layer w0.152: v1(81.5,23.9) v1(81.5,26.4)
NCRL_5: J2.2 R30.2 | length 135.2
  Top Layer w0.152: R30.2 v1(45.5,23.9) ; v1(45.5,27) 163.9,27 170.8,33.9 J2.2@173.7,33.9
  Bottom Layer w0.152: v1(45.5,23.9) v1(45.5,27)
NCRL_6: J2.1 R28.2 | length 159.5
  Top Layer w0.152: R28.2 v1(22.5,23.9) ; v1(22.5,27.6) 163.2,27.6 172,36.4 J2.1@173.7,36.4
  Bottom Layer w0.152: v1(22.5,23.9) v1(22.5,27.6)
NCRL_P: J2.11 R54.1 | length 51.7
  Top Layer w0.152: R54.1 v1(155,5.4)
  Bottom Layer w0.152: v1(155,5.4) 155,4.562 155.1,4.462 161.3,4.462 169,12.162 169,35.4 172,38.4 174.5,38.4 J2.11@176.4,36.5
NE: NE1.2 NE2.2 T16.3 | length 135.6
  Top Layer w0.152: v1(63,28.2) 122.1,28.2 ; v1(122.1,28.8) 122.1,28.2 ; T16.3 159.5,6 v1(159.5,5.8) ; v1(160.5,28.2) 122.1,28.2
  Bottom Layer w0.152: v1(63,28.2) 63,34.96 NE2.2 ; NE1.2 122.1,34.94 v1(122.1,28.8) ; v1(159.5,5.8) 160.5,6.8 v1(160.5,28.2)
NE1: NE1.1 R37.1 | length 13.2
  Top Layer w0.152: R37.1 v1(119.5,23.8)
  Bottom Layer w0.152: NE1.1 116.96,26.34 v1(119.5,23.8)
NE2: NE2.1 R32.1 | length 13.2
  Top Layer w0.152: R32.1 v1(60.5,23.9)
  Bottom Layer w0.152: NE2.1 57.96,26.44 v1(60.5,23.9)
NIXIE_0: J2.14 R57.1 | length 62.6
  Top Layer w0.152: R57.1 v1(137,5.4)
  Bottom Layer w0.152: v1(137,5.4) 137,4.1 137.247,3.853 161.553,3.853 169.61,11.91 169.61,28.21 171.4,30 175.1,30 J2.14@176.3,28.8
NIXIE_1: J2.7 R66.1 | length 136.7
  Top Layer w0.152: R66.1 v1(56,5.3) ; v1(163.7,1.4) 163.7,3.931 170.89,11.121 170.89,18.89 173.2,21.2 J2.7@173.4,21.2
  Bottom Layer w0.152: v1(56,5.3) 56,1.51 56.4,1.11 163.51,1.11 163.7,1.3 v1(163.7,1.4)
NIXIE_2: J2.8 R65.1 | length 124.8
  Top Layer w0.152: R65.1 v1(65,5.4) ; v1(164.3,2.5) 164.3,4.1 171.195,10.995 171.195,13.926 171.2,13.931 171.2,16.5 173.3,18.6 J2.8@173.7,18.6
  Bottom Layer w0.152: v1(65,5.4) 65,1.7 65.286,1.414 162.745,1.414 163.831,2.5 v1(164.3,2.5)
NIXIE_3: J2.9 R64.1 | length 112.3
  Top Layer w0.152: R64.1 v1(74,5.4) ; v1(165,3.8) 165.3,3.8 171.5,10 171.5,13.8 J2.9@173.7,16
  Bottom Layer w0.152: v1(74,5.4) 74,2.019 74.3,1.719 162.619,1.719 164.7,3.8 v1(165,3.8)
NIXIE_4: J2.20 R63.1 | length 104.8
  Top Layer w0.152: R63.1 v1(83,5.4)
  Bottom Layer w0.152: v1(83,5.4) 83,2.224 83.2,2.024 162.348,2.024 171.51,11.185 171.51,13.8 172.51,14.8 175.2,14.8 J2.20@176.3,13.7
NIXIE_5: J2.19 R62.1 | length 98.1
  Top Layer w0.152: R62.1 v1(92,5.4)
  Bottom Layer w0.152: v1(92,5.4) 92,2.629 92.3,2.329 162.222,2.329 171.205,11.312 171.205,16.5 172.105,17.4 175.2,17.4 176.3,16.3 J2.19@176.3,16.1
NIXIE_6: J2.18 R61.1 | length 91
  Top Layer w0.152: R61.1 v1(101,5.4)
  Bottom Layer w0.152: v1(101,5.4) 101,2.834 101.2,2.634 162.096,2.634 170.9,11.438 170.9,18.9 171.9,19.9 175.1,19.9 J2.18@176.3,18.7
NIXIE_7: J2.17 R60.1 | length 84.1
  Top Layer w0.152: R60.1 v1(110,5.4)
  Bottom Layer w0.152: v1(110,5.4) 110,3.2 110.262,2.938 161.969,2.938 170.524,11.493 170.524,21.3 171.724,22.5 175.1,22.5 J2.17@176.4,21.2
NIXIE_8: J2.16 R59.1 | length 76.9
  Top Layer w0.152: R59.1 v1(119,5.4)
  Bottom Layer w0.152: v1(119,5.4) 119,3.543 119.3,3.243 161.843,3.243 170.219,11.619 170.219,23.619 171.6,25 175,25 J2.16@176.3,23.7
NIXIE_9: J2.15 R58.1 | length 69.5
  Top Layer w0.152: R58.1 v1(128,5.4)
  Bottom Layer w0.152: v1(128,5.4) 128,3.8 128.252,3.548 161.679,3.548 169.914,11.783 169.914,25.314 172.2,27.6 175.1,27.6 176.3,26.4 J2.15@176.3,26.3
NIXIE_PL: J2.13 R56.1 | length 55.9
  Top Layer w0.152: R56.1 v1(146,5.4)
  Bottom Layer w0.152: v1(146,5.4) 146,4.4 146.242,4.158 161.426,4.158 169.305,12.036 169.305,30.805 171.1,32.6 175.2,32.6 176.4,31.4 J2.13@176.4,31.3
NIXIE_PR: J2.12 R55.1 | length 164.4
  Top Layer w0.152: R55.1 v1(47,5.3)
  Bottom Layer w0.152: v1(47,5.3) 47,1 47.195,0.805 164.105,0.805 174.7,11.4 176.6,11.4 178.2,13 178.2,33.8 178,34 J2.12@176.2,34
PL: N1.2 N2.2 N3.2 N4.2 N5.2 N6.2 T17.3 | length 307.6
  Top Layer w0.152: v1(28.1,18.5) 50.5,18.5 ; v1(50.5,19) 50.5,18.5 ; T17.3 v1(51.5,5.8) ; v1(51.5,19) 51.5,18.5 ; v1(86.9,19) 86.9,18.5 ; v1(109.8,19) 109.8,18.5 ; v1(146,19) 146,18.5 ; v1(167.8,18.5) 146,18.5 ; 50.5,18.5 51.5,18.5 ; 51.5,18.5 86.9,18.5 ; 86.9,18.5 109.8,18.5 ; 109.8,18.5 146,18.5
  Bottom Layer w0.152: N6.2 24.83,39.87 28.1,36.6 v1(28.1,18.5) ; N5.2 47.63,39.87 50.5,37 v1(50.5,19) ; v1(51.5,5.8) v1(51.5,19) ; N4.2 83.93,39.87 86.9,36.9 v1(86.9,19) ; N3.2 108.23,39.87 109.8,38.3 v1(109.8,19) ; N2.2 143.23,39.87 146,37.1 v1(146,19) ; N1.2 165.93,39.87 167.8,38 v1(167.8,18.5)
PR: N1.13 N2.13 N3.13 N4.13 N5.13 N6.13 T18.3 | length 368.3
  Top Layer w0.152: v1(11.2,6.4) 32.9,6.4 34.6,6.4 ; v1(34.549,6.9) 34.549,6.451 34.6,6.4 ; v1(70.1,6.9) 70.1,6.4 ; v1(93.4,6.9) 93.4,6.4 ; v1(129.1,6.9) 129.1,6.4 ; T18.3 150.5,6.4 ; v1(151.5,6.4) 150.5,6.4 ; 34.6,6.4 70.1,6.4 ; 70.1,6.4 93.4,6.4 ; 93.4,6.4 129.1,6.4 ; 129.1,6.4 150.5,6.4
  Bottom Layer w0.152: v1(11.2,6.4) 11.2,37 14.07,39.87 N6.13 ; v1(34.549,6.9) v1(34.549,6.9) 34.55,8.88 34.549,37.449 36.97,39.87 N5.13 ; v1(70.1,6.9) 70.1,37.1 72.87,39.87 N4.13 ; v1(93.4,6.9) 93.4,37.6 95.67,39.87 N3.13 ; v1(129.1,6.9) 129.1,37.3 131.67,39.87 N2.13 ; v1(151.5,6.4) 151.4,36.2 155.2,40 157.814,40 N1.13
R67: R53.2 T9.3 | length 8.3
  Top Layer w0.152: T9.3 154,24 154.2,24.2 155.1,24.2 v1(156.2,23.1) ; v1(156.2,20.7) 156.6,20.3 157.5,20.3 R53.2
  Bottom Layer w0.152: v1(156.2,20.7) v1(156.2,23.1)
R68: R41.1 R47.2 T9.1 | length 10.9
  Top Layer w0.152: T9.1 153,21.6 153.4,22 159.4,22 161.3,22 161.5,22.2 R47.2 ; 159.5,22.1 R41.1
R69: R47.1 T15.3 | length 10
  Top Layer w0.152: R47.1 161.5,20.1 162,19.6 166.6,19.6 167,20 T15.3
R70: R52.2 T8.3 | length 8.5
  Top Layer w0.152: T8.3 131,24.1 131.3,24.4 131.9,24.4 v1(133.2,23.1) ; v1(133.2,20.6) 133.5,20.3 134.3,20.3 134.5,20.5 R52.2
  Bottom Layer w0.152: v1(133.2,20.6) v1(133.2,23.1)
R71: R46.1 T14.3 | length 11.3
  Top Layer w0.152: R46.1 138.5,20.5 138.6,20.4 139.3,20.4 139.6,20.7 139.6,24.2 140,24.6 143.6,24.6 144.1,24.1 144.1,23.2 T14.3
R72: R39.1 R46.2 T8.1 | length 11.2
  Top Layer w0.152: T8.1 130,21.8 130.2,22 136.5,22 ; R39.1 136.5,22 ; R46.2 138.5,22.2 138.3,22 136.5,22
R73: R51.2 T7.3 | length 8.1
  Top Layer w0.152: T7.3 95,24.1 95.2,24.3 95.6,24.3 v1(97.1,22.8) ; v1(97.1,20.7) 97.5,20.3 98.2,20.3 98.5,20.6 R51.2
  Bottom Layer w0.152: v1(97.1,20.7) v1(97.1,22.8)
R74: R45.1 T13.3 | length 10.9
  Top Layer w0.152: R45.1 102.5,20.5 102.6,20.4 103.2,20.4 103.5,20.7 103.5,23.9 104.1,24.5 107.6,24.5 108,24.1 T13.3
R75: R36.1 R45.2 T7.1 | length 11.2
  Top Layer w0.152: T7.1 94,21.8 94.175,21.975 100.5,21.975 ; R36.1 100.5,21.975 ; R45.2 102.5,22.15 102.325,21.975 100.5,21.975
R76: R50.2 T6.3 | length 8.4
  Top Layer w0.152: T6.3 72,24.2 72.1,24.3 73.2,24.3 v1(74.2,23.3) ; v1(74.2,20.8) 74.6,20.4 75.4,20.4 75.5,20.5 R50.2
  Bottom Layer w0.152: v1(74.2,20.8) v1(74.2,23.3)
R77: R44.1 T12.3 | length 11.2
  Top Layer w0.152: R44.1 79.5,20.5 79.6,20.4 80.3,20.4 80.4,20.5 80.4,24.1 80.8,24.5 84.7,24.5 85,24.2 T12.3
R78: R34.1 R44.2 T6.1 | length 11.1
  Top Layer w0.152: T6.1 71,21.8 71.2,22 77.5,22 ; R34.1 77.5,22 ; R44.2 79.5,22.3 79.2,22 77.5,22
R79: R49.2 T5.3 | length 8.2
  Top Layer w0.152: T5.3 36,24 36.2,24.2 37.1,24.2 v1(38.2,23.1) ; v1(38.2,21) 38.2,20.7 38.6,20.3 39.3,20.3 39.5,20.5 R49.2
  Bottom Layer w0.152: v1(38.2,21) v1(38.2,23.1)
R80: R31.1 R43.2 T5.1 | length 11.1
  Top Layer w0.152: T5.1 35,21.8 35.2,22 41.5,22 ; R31.1 41.5,22 ; R43.2 43.5,22.3 43.2,22 41.5,22
R81: R43.1 T11.3 | length 10.7
  Top Layer w0.152: R43.1 43.5,20.5 43.6,20.4 44.2,20.4 44.4,20.6 44.4,23.572 45.274,24.446 48.654,24.446 49,24.1 T11.3
R82: R48.2 T4.3 | length 8.6
  Top Layer w0.152: T4.3 13,24.1 13.2,24.3 14.3,24.3 v1(15.1,23.5) ; v1(15.1,21.3) 15.1,20.6 15.4,20.3 16.3,20.3 16.5,20.5 R48.2
  Bottom Layer w0.152: v1(15.1,21.3) v1(15.1,23.5)
R83: R42.1 T10.3 | length 11.3
  Top Layer w0.152: R42.1 20.5,20.5 20.6,20.4 21.1,20.4 21.4,20.7 21.4,24.3 21.7,24.6 25.6,24.6 26,24.2 T10.3
R84: R29.1 R42.2 T4.1 | length 11
  Top Layer w0.152: T4.1 12,21.7 12.3,22 18.5,22 ; R29.1 18.5,22 ; R42.2 20.5,22.3 20.2,22 18.5,22
RED: J1.11 R25.1 | length 63.5
  Top Layer w0.152: R25.1 v1(38,5.2)
  Bottom Layer w0.152: J1.11 8.6,34.1 8.6,32.8 9.295,32.105 9.295,4.705 10.3,3.7 36.5,3.7 v1(38,5.2)
T-LB: R27.2 T3.1 | length 5.7
  Top Layer w0.152: R27.2 20,1.7 20.6,1.1 23.1,1.1 23.5,1.5 T3.1
T-LG: R26.2 T2.1 | length 5.5
  Top Layer w0.152: R26.2 29,2 29.8,1.2 32.3,1.2 32.5,1.4 T2.1
T-LR: R25.2 T1.1 | length 5.9
  Top Layer w0.152: R25.2 38,1.5 38.4,1.1 41.3,1.1 41.5,1.3 T1.1
T_NCRL_0: R40.2 T15.1 | length 4.3
  Top Layer w0.152: R40.2 163.5,21.9 163.6,22 165.8,22 166,21.8 T15.1
T_NCRL_1: R38.1 T14.1 | length 4.3
  Top Layer w0.152: R38.1 140.5,21.7 140.8,22 142.9,22 143.1,21.8 143.1,21 T14.1
T_NCRL_2: R35.1 T13.1 | length 4.3
  Top Layer w0.152: R35.1 104.5,21.8 104.7,22 106.8,22 107,21.8 T13.1
T_NCRL_3: R33.2 T12.1 | length 4.3
  Top Layer w0.152: R33.2 81.5,21.8 81.7,22 83.9,22 84,21.9 T12.1
T_NCRL_4: R30.1 T11.1 | length 4.2
  Top Layer w0.152: R30.1 45.5,21.8 45.7,22 47.7,22 48,21.7 T11.1
T_NCRL_5: R28.1 T10.1 | length 4.3
  Top Layer w0.152: R28.1 22.5,21.8 22.7,22 24.9,22 25,21.9 T10.1
T_NCRL_P: R54.2 T16.1 | length 5.7
  Top Layer w0.152: R54.2 155,1.6 155.4,1.2 158.2,1.2 158.5,1.5 T16.1
T_NIXIE_0: R57.2 T19.1 | length 5.8
  Top Layer w0.152: R57.2 137,1.6 137.5,1.1 140.1,1.1 140.5,1.5 T19.1
T_NIXIE_1: R66.2 T28.1 | length 5.9
  Top Layer w0.152: R66.2 56,1.6 56.6,1 59.1,1 59.5,1.4 T28.1
T_NIXIE_2: R65.2 T27.1 | length 5.8
  Top Layer w0.152: R65.2 65,1.8 65.8,1 68.1,1 68.5,1.4 T27.1
T_NIXIE_3: R64.2 T26.1 | length 5.8
  Top Layer w0.152: R64.2 74,1.8 74.7,1.1 77.3,1.1 77.5,1.3 T26.1
T_NIXIE_4: R63.2 T25.1 | length 5.9
  Top Layer w0.152: R63.2 83,1.6 83.5,1.1 86.3,1.1 86.5,1.3 T25.1
T_NIXIE_5: R62.2 T24.1 | length 5.9
  Top Layer w0.152: R62.2 92,1.6 92.5,1.1 95.3,1.1 95.5,1.3 T24.1
T_NIXIE_6: R61.2 T23.1 | length 5.9
  Top Layer w0.152: R61.2 101,1.6 101.5,1.1 104.3,1.1 104.5,1.3 T23.1
T_NIXIE_7: R60.2 T22.1 | length 5.5
  Top Layer w0.152: R60.2 110,1.8 110.5,1.3 113.4,1.3 113.5,1.4 T22.1
T_NIXIE_8: R59.2 T21.1 | length 5.7
  Top Layer w0.152: R59.2 119,1.6 119.4,1.2 122.3,1.2 122.5,1.4 T21.1
T_NIXIE_9: R58.2 T20.1 | length 5.9
  Top Layer w0.152: R58.2 128,1.5 128.4,1.1 131.2,1.1 131.5,1.4 T20.1
T_NIXIE_PL: R56.2 T18.1 | length 5.6
  Top Layer w0.152: R56.2 146,1.8 146.6,1.2 149.3,1.2 149.5,1.4 T18.1
T_NIXIE_PR: R55.2 T17.1 | length 5.9
  Top Layer w0.152: R55.2 47,1.7 47.7,1 50.2,1 50.5,1.3 T17.1
pads on no net: J1.4 J1.5 J1.14 J1.15

## Polygon pours and split planes (outlines as drawn)
GND on Top Layer "Top Layer-GND" (solid, pour order 0): 0.5,0.5 0.5,49.5 179.5,49.5 179.5,0.5
GND on Bottom Layer "Bottom Layer-GND" (solid, pour order 2): 0.5,49.5 0.5,0.5 179.5,0.5 179.5,49.5

## Keep-outs
Keep-Out Layer:
  lines w0.152: 0.5,0.5 179.5,0.5 179.5,49.5 0.5,49.5 0.5,0.5

## Other copper
Top Layer:
  pour cut-out: 171,5 ccw(c175,5) 175,1 ccw(c175,5) 179,5 ccw(c175,5) 175,9 ccw(c175,5)
  pour cut-out: 171,45 ccw(c175,45) 175,41 ccw(c175,45) 179,45 ccw(c175,45) 175,49 ccw(c175,45)
  pour cut-out: 5,41 cw(c5,45) 1,45 cw(c5,45) 5,49 cw(c5,45) 9,45 cw(c5,45)
  pour cut-out: 1,5 ccw(c5,5) 5,1 ccw(c5,5) 9,5 ccw(c5,5) 5,9 ccw(c5,5)
Bottom Layer:
  pour cut-out: 171,5 ccw(c175,5) 175,1 ccw(c175,5) 179,5 ccw(c175,5) 175,9 ccw(c175,5)
  pour cut-out: 171,45 ccw(c175,45) 175,41 ccw(c175,45) 179,45 ccw(c175,45) 175,49 ccw(c175,45)
  pour cut-out: 5,41 cw(c5,45) 1,45 cw(c5,45) 5,49 cw(c5,45) 9,45 cw(c5,45)
  pour cut-out: 1,5 ccw(c5,5) 5,1 ccw(c5,5) 9,5 ccw(c5,5) 5,9 ccw(c5,5)
  pour cut-out: 9,5

## Silkscreen, mask and mechanical layers (free items; w line width, h text height)
Top Overlay:
  circle w0.254: c175,5 r4
  circle w0.254: c175,45 r4
  circle w0.254: c5,45 r4
  circle w0.254: c5,5 r4
  text "NIXIE _B1" at 141,45 h5.08
  text "MDA" at 161,3 h7.5
Mechanical 1:
  the board outline again, w0.152